# EAGLE board board-mostlaidout-more (EAGLE 9.5.2)
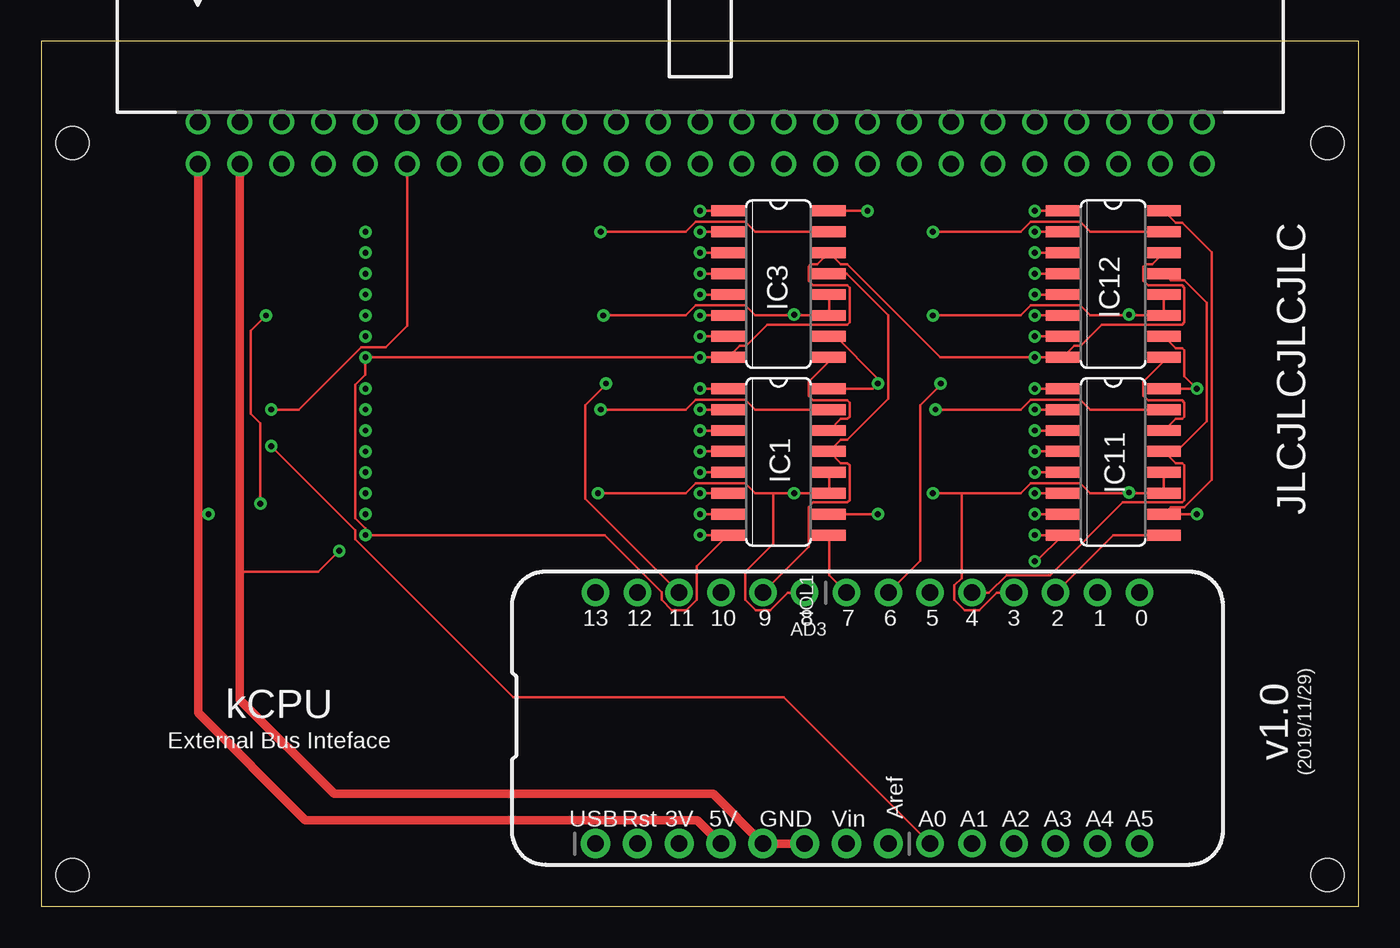
[diagram p0: board, top side]
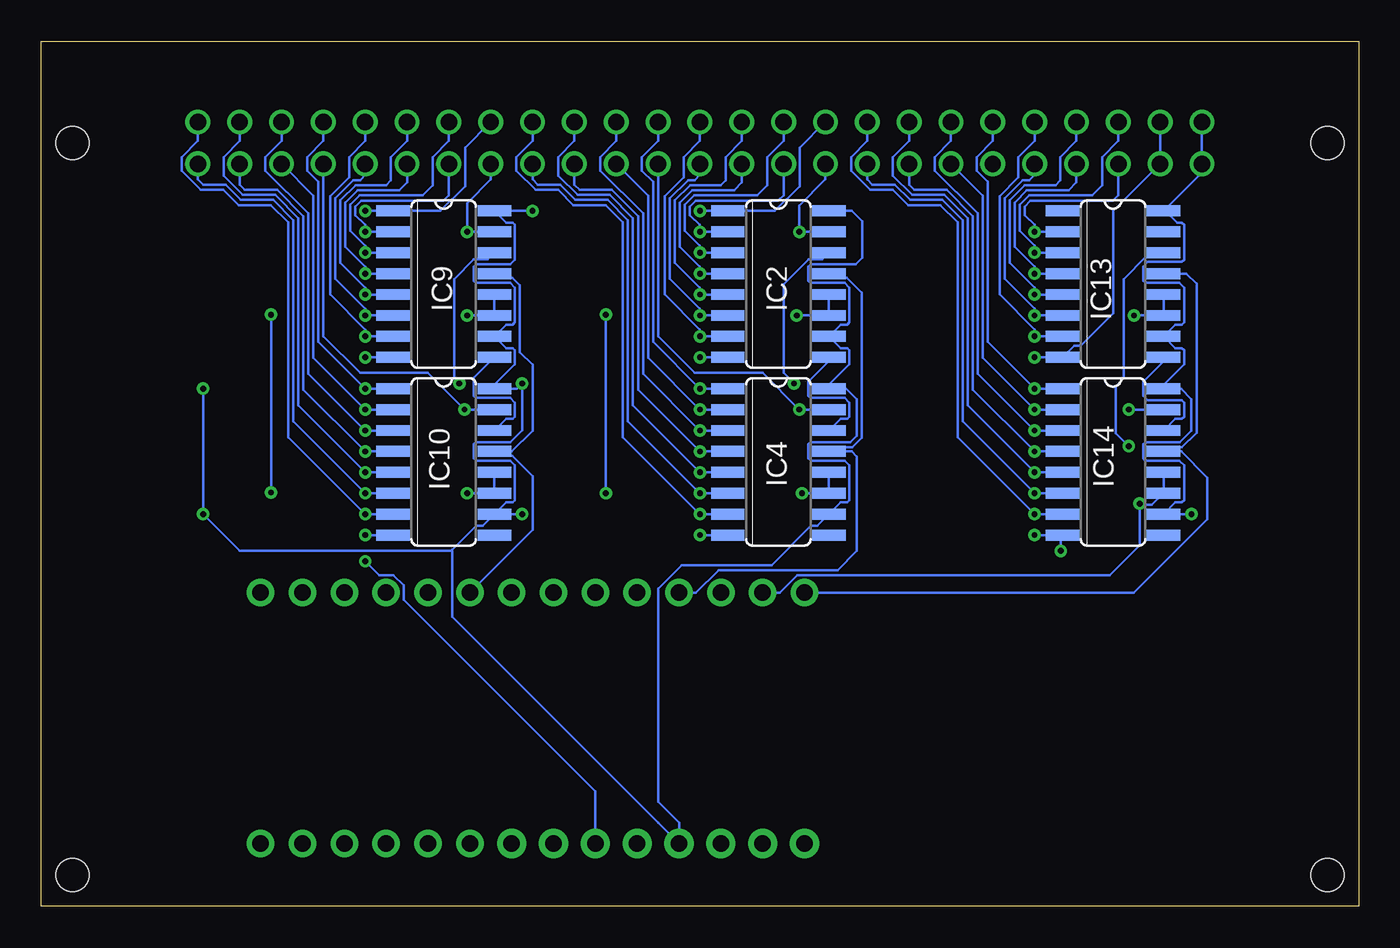
[diagram p1: board, bottom side, seen from below]

Size 80 x 52.53 mm. Coordinates in mm from the lower left corner, seen from the top.
Outline: 0,0 80,0 80,52.53 0,52.53 0,0
Copper layers (1*16): Top 0.035mm / dielectric 1.5mm / Bottom 0.035mm
Design rules "default": minimum track width 6mil, minimum drill 0.35mm, track to track 6mil, track to pad 6mil, pad to pad 6mil, via to via 6mil, smd to smd 6mil, copper to edge 40mil, drill to drill 6mil, minimum pad ring 10mil, minimum via ring 8mil, stop-mask expansion 4mil, vias tented up to drill 0mil, thermal gap 10mil
Net classes: 1 power: width 0.305 mm, drill 0.483 mm, clearance 0.203 mm; 2 gnd: width 0.305 mm, drill 0.483 mm, clearance 0.203 mm; 3 usbvcc: width 0.305 mm, drill 0.483 mm, clearance 0.203 mm
Holes 2 mm at 1.91,46.35 78.11,46.35 1.91,1.91 78.11,1.91

## Footprints (pad centres in the part's own frame; a part is rotated, then mirrored left to right if it is on the bottom)
1X06_ROUND = drill 1 pad 1.676: 1 -6.35,0; 2 -3.81,0; 3 -1.27,0; 4 1.27,0; 5 3.81,0; 6 6.35,0
SO16 = smd 0.66 x 2.032: 1 -4.445,-3.073; 2 -3.175,-3.073; 3 -1.905,-3.073; 4 -0.635,-3.073; 5 0.635,-3.073; 6 1.905,-3.073; 7 3.175,-3.073; 8 4.445,-3.073; 9 4.445,3.073; 10 3.175,3.073; 11 1.905,3.073; 12 0.635,3.073; 13 -0.635,3.073; 14 -1.905,3.073; 15 -3.175,3.073; 16 -4.445,3.073
1X08_ROUND = drill 1 pad 1.676: 1 -8.89,0; 2 -6.35,0; 3 -3.81,0; 4 -1.27,0; 5 1.27,0; 6 3.81,0; 7 6.35,0; 8 8.89,0
1X08_ROUND_70 = drill 1 pad 1.778: 1 -8.89,0; 2 -6.35,0; 3 -3.81,0; 4 -1.27,0; 5 1.27,0; 6 3.81,0; 7 6.35,0; 8 8.89,0
PAK100/2500-5-50 = drill 1 pad 1.422: 1 -30.48,-1.27; 2 -30.48,1.27; 3 -27.94,-1.27; 4 -27.94,1.27; 5 -25.4,-1.27; 6 -25.4,1.27; 7 -22.86,-1.27; 8 -22.86,1.27; 9 -20.32,-1.27; 10 -20.32,1.27; 11 -17.78,-1.27; 12 -17.78,1.27; 13 -15.24,-1.27; 14 -15.24,1.27; 15 -12.7,-1.27; 16 -12.7,1.27; 17 -10.16,-1.27; 18 -10.16,1.27; 19 -7.62,-1.27; 20 -7.62,1.27; 21 -5.08,-1.27; 22 -5.08,1.27; 23 -2.54,-1.27; 24 -2.54,1.27; 25 0,-1.27; 26 0,1.27; 27 2.54,-1.27; 28 2.54,1.27; 29 5.08,-1.27; 30 5.08,1.27; 31 7.62,-1.27; 32 7.62,1.27; 33 10.16,-1.27; 34 10.16,1.27; 35 12.7,-1.27; 36 12.7,1.27; 37 15.24,-1.27; 38 15.24,1.27; 39 17.78,-1.27; 40 17.78,1.27; 41 20.32,-1.27; 42 20.32,1.27; 43 22.86,-1.27; 44 22.86,1.27; 45 25.4,-1.27; 46 25.4,1.27; 47 27.94,-1.27; 48 27.94,1.27; 49 30.48,-1.27; 50 30.48,1.27

## Placement (x,y rotation side)
AD2  20609  [1X06_ROUND]  60.33,3.81 0 top
AD3  20609  [1X06_ROUND]  40.01,19.05 180 top
IC1  74HC597D  [SO16]  44.77,26.99 270 top
IC2  74HC595D  [SO16]  35.24,37.78 270 bottom
IC3  74HC597D  [SO16]  44.77,37.78 270 top
IC4  74HC595D  [SO16]  35.24,26.99 270 bottom
IC9  74HC595D  [SO16]  55.56,37.78 270 bottom
IC10  74HC595D  [SO16]  55.56,26.99 270 bottom
IC11  74HC597D  [SO16]  65.09,26.99 270 top
IC12  74HC597D  [SO16]  65.09,37.78 270 top
IC13  74HC595D  [SO16]  14.92,37.78 270 bottom
IC14  74HC595D  [SO16]  14.92,26.99 270 bottom
IOL1  20610  [1X08_ROUND]  57.78,19.05 0 top
POWER2  20610  [1X08_ROUND_70]  42.55,3.81 0 top
X1  2550-5  [PAK100/2500-5-50]  40.01,46.35 0 top

## Library data of the parts
AD2 AD3 IOL1 POWER2 = microbuilder
IC1-IC4 IC9-IC14 = 74xx-eu
X1 = con-3m; OC_FARNELL: 1788696; OC_NEWARK: unknown

## Nets
BUSA_BIT0: IC2.15 IC3.15 X1.19
BUSA_BIT1: IC2.1 IC3.1 X1.20
BUSA_BIT2: IC2.2 IC3.2 X1.21
BUSA_BIT3: IC2.3 IC3.3 X1.22
BUSA_BIT4: IC2.4 IC3.4 X1.23
BUSA_BIT5: IC2.5 IC3.5 X1.24
BUSA_BIT6: IC2.6 IC3.6 X1.25
BUSA_BIT7: IC2.7 IC3.7 X1.26
BUSA_BIT8: IC1.15 IC4.15 X1.27
BUSA_BIT9: IC1.1 IC4.1 X1.28
BUSA_BIT10: IC1.2 IC4.2 X1.29
BUSA_BIT11: IC1.3 IC4.3 X1.30
BUSA_BIT12: IC1.4 IC4.4 X1.31
BUSA_BIT13: IC1.5 IC4.5 X1.32
BUSA_BIT14: IC1.6 IC4.6 X1.33
BUSA_BIT15: IC1.7 IC4.7 X1.34
BUSA_CLK: AD3.1 IC1.11 IC1.12 IC2.11 IC2.12 IC3.11 IC3.12 IC4.11 IC4.12
BUSA_N_LATCH: AD3.2 IC1.13 IC3.13
BUSA_N_OE: AD3.3 IC2.13 IC4.13
BUSA_SIN: AD3.4 IC2.14
BUSA_SOUT: IC1.9 IOL1.1
BUSB_BIT0: IC9.15 IC12.15 X1.35
BUSB_BIT1: IC9.1 IC12.1 X1.36
BUSB_BIT2: IC9.2 IC12.2 X1.37
BUSB_BIT3: IC9.3 IC12.3 X1.38
BUSB_BIT4: IC9.4 IC12.4 X1.39
BUSB_BIT5: IC9.5 IC12.5 X1.40
BUSB_BIT6: IC9.6 IC12.6 X1.41
BUSB_BIT7: IC9.7 IC12.7 X1.42
BUSB_BIT8: IC10.15 IC11.15 X1.43
BUSB_BIT9: IC10.1 IC11.1 X1.44
BUSB_BIT10: IC10.2 IC11.2 X1.45
BUSB_BIT11: IC10.3 IC11.3 X1.46
BUSB_BIT12: IC10.4 IC11.4 X1.47
BUSB_BIT13: IC10.5 IC11.5 X1.48
BUSB_BIT14: IC10.6 IC11.6 X1.49
BUSB_BIT15: IC10.7 IC11.7 X1.50
BUSB_CLK: IC9.11 IC9.12 IC10.11 IC10.12 IC11.11 IC11.12 IC12.11 IC12.12 IOL1.5
BUSB_N_LATCH: IC11.13 IC12.13 IOL1.4
BUSB_N_OE: IC9.13 IC10.13 IOL1.3
BUSB_SIN: IC9.14 IOL1.2
BUSB_SOUT: IC11.9 IOL1.6
BUSC_BIT2: IC13.2 X1.5
BUSC_BIT3: IC13.3 X1.6
BUSC_BIT4: IC13.4 X1.7
BUSC_BIT5: IC13.5 X1.8
BUSC_BIT6: IC13.6 X1.9
BUSC_BIT7: IC13.7 X1.10
BUSC_BIT8: IC14.15 X1.11
BUSC_BIT9: IC14.1 X1.12
BUSC_BIT10: IC14.2 X1.13
BUSC_BIT11: IC14.3 X1.14
BUSC_BIT12: IC14.4 X1.15
BUSC_BIT13: IC14.5 X1.16
BUSC_BIT14: IC14.6 X1.17
BUSC_BIT15: IC14.7 X1.18
BUSC_CLK: AD3.5 IC13.11 IC13.12 IC14.11 IC14.12
BUSC_N_OE: AD3.6 IC13.13 IC14.13
BUSC_SIN: AD2.1 IC13.14
GND: IC1.8 IC2.8 IC3.8 IC3.14 IC4.8 IC9.8 IC10.8 IC11.8 IC12.8 IC12.14 IC13.8 IC14.8 POWER2.5 POWER2.6 X1.3 X1.4
N$1: IC2.9 IC4.14
N$2: IC1.14 IC3.9
N$5: IC9.9 IC10.14
N$6: IC11.14 IC12.9
N$7: IC13.9 IC14.14
VCC: IC1.10 IC1.16 IC2.10 IC2.16 IC3.10 IC3.16 IC4.10 IC4.16 IC9.10 IC9.16 IC10.10 IC10.16 IC11.10 IC11.16 IC12.10 IC12.16 IC13.10 IC13.16 IC14.10 IC14.16 POWER2.4 X1.1 X1.2

## Tracks (layer width: path | path; a pad name or v marks a point on that pad's centre or on a via)
BUSA_BIT0  (via drill 0.35)
  Top 0.152: IC3.15 43.36,40.96 42.76,41.56 39.75,41.56 39.15,40.96 v33.97,40.96
  Bottom 0.152: IC2.15 v33.97,40.96 33.97,42.55 32.38,44.13 X1.19
BUSA_BIT1  (via drill 0.35)
  Top 0.152: v40.01,42.23 IC3.1
  Bottom 0.152: v40.01,42.23 IC2.1 35.45,42.23 33.94,43.73 33.94,46.07 X1.20
BUSA_BIT2  (via drill 0.35)
  Top 0.152: v40.01,40.96 IC3.2
  Bottom 0.152: IC2.2 v40.01,40.96 40.01,41.37 40.61,41.98 40.61,42.48 40.26,42.83 35.27,42.83 34.92,43.18 X1.21
BUSA_BIT3  (via drill 0.35)
  Top 0.152: v40.01,39.69 IC3.3
  Bottom 0.152: IC2.3 v40.01,39.69 40.01,40.1 40.92,41.01 40.92,42.6 40.34,43.18 36.51,43.18 35.91,43.78 35.91,45.49 34.92,46.48 X1.22
BUSA_BIT4  (via drill 0.35)
  Top 0.152: v40.01,38.42 IC3.4
  Bottom 0.152: IC2.4 v40.01,38.42 40.01,38.83 41.22,40.05 41.22,42.73 40.47,43.48 37.94,43.48 37.47,43.95 X1.23
BUSA_BIT5  (via drill 0.35)
  Top 0.152: v40.01,37.15 IC3.5
  Bottom 0.152: IC2.5 v40.01,37.15 40.01,37.56 41.53,39.08 41.53,42.86 40.59,43.79 38.73,43.79 38.45,44.08 38.45,45.49 37.47,46.48 X1.24
BUSA_BIT6  (via drill 0.35)
  Top 0.152: v40.01,35.88 IC3.6
  Bottom 0.152: IC2.6 v40.01,35.88 40.01,36.29 41.83,38.12 41.83,42.98 40.72,44.09 40.32,44.09 40.01,44.41 X1.25
BUSA_BIT7  (via drill 0.35)
  Top 0.152: v40.01,34.61 IC3.7
  Bottom 0.152: IC2.7 v40.01,34.61 40.01,35.02 42.14,37.15 42.14,43.11 40.99,44.26 40.99,45.49 40.01,46.48 X1.26
BUSA_BIT8  (via drill 0.35)
  Top 0.152: v33.97,30.16 39.15,30.16 39.75,30.77 42.76,30.77 43.36,30.16 IC1.15
  Bottom 0.152: IC4.15 v33.97,30.16 36.2,32.38 40.32,32.38 42.55,34.61 X1.27
BUSA_BIT9  (via drill 0.35)
  Top 0.152: v40.01,31.43 IC1.1
  Bottom 0.152: IC4.1 v40.01,31.43 42.85,34.28 42.85,44 43.53,44.68 43.53,45.49 42.55,46.48 X1.28
BUSA_BIT10  (via drill 0.35)
  Top 0.152: v40.01,30.16 IC1.2
  Bottom 0.152: IC4.2 v40.01,30.16 43.16,33.31 43.16,33.72 43.16,40.64 43.16,43.16 X1.29
BUSA_BIT11  (via drill 0.35)
  Top 0.152: v40.01,28.89 IC1.3
  Bottom 0.152: IC4.3 v40.01,28.89 43.46,32.35 43.46,42.07 46.07,44.68 46.07,45.49 45.09,46.48 X1.30
BUSA_BIT12  (via drill 0.35)
  Top 0.152: v40.01,27.62 IC1.4
  Bottom 0.152: IC4.4 v40.01,27.62 43.76,31.38 43.76,41.91 45.35,43.5 47.31,43.5 47.62,43.81 X1.31
BUSA_BIT13  (via drill 0.35)
  Top 0.152: v40.01,26.35 IC1.5
  Bottom 0.152: IC4.5 v40.01,26.35 44.07,30.42 44.07,41.78 45.48,43.19 47.43,43.19 48.61,44.37 48.61,45.49 47.62,46.48 X1.32
BUSA_BIT14  (via drill 0.35)
  Top 0.152: v40.01,25.08 IC1.6
  Bottom 0.152: IC4.6 v40.01,25.08 44.37,29.45 44.37,41.66 45.6,42.89 47.56,42.89 48.49,43.81 49.85,43.81 50.16,44.13 X1.33
BUSA_BIT15  (via drill 0.35)
  Top 0.152: v40.01,23.81 IC1.7
  Bottom 0.152: IC4.7 v40.01,23.81 44.68,28.49 44.68,41.53 45.73,42.58 47.69,42.58 48.61,43.51 49.98,43.51 51.15,44.68 51.15,45.49 50.16,46.48 X1.34
BUSA_CLK  (via drill 0.35)
  Top 0.152: v34.13,35.88 39.15,35.88 39.75,36.48 42.76,36.48 43.36,35.88 45.72,35.88 | 45.72,35.88 IC3.11 IC3.12 | IC1.12 IC1.11 v45.72,25.08 44.45,25.08 | v33.81,25.08 39.15,25.08 39.75,25.69 42.76,25.69 43.36,25.08 44.45,25.08 | AD3.1 45.32,19.05 44.26,17.98 43.37,17.98 42.75,18.61 42.75,20.32 44.45,22.02 44.45,25.08 | 45.72,35.88 v45.72,35.92
  Bottom 0.152: v34.13,35.88 IC2.11 IC2.12 | IC4.12 IC4.11 v33.81,25.08 | v45.72,35.92 v45.72,25.08
BUSA_N_LATCH
  Top 0.152: IC3.13 48.9,38.42 51.44,35.88 51.44,30.82 48.95,28.33 48.55,28.33 IC1.13 48.55,26.91 48.95,26.91 49.09,26.78 49.09,24.66 48.95,24.52 46.88,24.52 46.6,24.24 46.6,21.83 AD3.2
BUSA_N_OE
  Bottom 0.152: AD3.3 40.24,19.05 38.87,20.42 31.65,20.42 30.48,21.59 30.48,27.3 30.8,27.62 IC4.13 31.91,27.88 30.75,27.88 30.18,28.45 30.18,37.25 31.09,38.16 31.91,38.16 IC2.13
BUSA_SIN  (via drill 0.35)
  Top 0.152: v34.29,31.75 34.29,31.66 33.05,30.41 33.05,24.74 AD3.4
  Bottom 0.152: IC2.14 32.58,39.28 33.41,39.28 34.92,37.76 34.92,32.38 v34.29,31.75
BUSA_SOUT
  Top 0.152: IOL1.1 47.84,20.1 IC1.9
BUSB_BIT0  (via drill 0.35)
  Top 0.152: v54.13,40.96 59.47,40.96 60.07,41.56 63.08,41.56 63.68,40.96 IC12.15
  Bottom 0.152: IC9.15 v54.13,40.96 54.13,42.7 52.7,44.13 X1.35
BUSB_BIT1  (via drill 0.35)
  Top 0.152: v60.33,42.23 IC12.1
  Bottom 0.152: v60.33,42.23 IC9.1 55.77,42.23 54.26,43.73 54.26,46.07 X1.36
BUSB_BIT2  (via drill 0.35)
  Top 0.152: v60.33,40.96 IC12.2
  Bottom 0.152: IC9.2 v60.33,40.96 60.33,41.37 60.93,41.98 60.93,42.48 60.58,42.83 55.59,42.83 55.24,43.18 X1.37
BUSB_BIT3  (via drill 0.35)
  Top 0.152: v60.33,39.69 IC12.3
  Bottom 0.152: IC9.3 v60.33,39.69 60.33,40.1 61.24,41.01 61.24,42.6 60.66,43.18 56.83,43.18 56.23,43.78 56.23,45.49 55.24,46.48 X1.38
BUSB_BIT4  (via drill 0.35)
  Top 0.152: v60.33,38.42 IC12.4
  Bottom 0.152: IC9.4 v60.33,38.42 60.33,38.83 61.54,40.05 61.54,42.73 60.79,43.48 58.26,43.48 57.78,43.95 X1.39
BUSB_BIT5  (via drill 0.35)
  Top 0.152: v60.33,37.15 IC12.5
  Bottom 0.152: IC9.5 v60.33,37.15 60.33,37.56 61.85,39.08 61.85,42.86 60.91,43.79 59.05,43.79 58.77,44.08 58.77,45.49 57.78,46.48 X1.40
BUSB_BIT6  (via drill 0.35)
  Top 0.152: v60.33,35.88 IC12.6
  Bottom 0.152: IC9.6 v60.33,35.88 60.33,36.29 62.15,38.12 62.15,42.98 61.04,44.09 60.64,44.09 60.33,44.41 X1.41
BUSB_BIT7  (via drill 0.35)
  Top 0.152: v60.33,34.61 IC12.7
  Bottom 0.152: IC9.7 v60.33,34.61 60.33,35.02 62.46,37.15 62.46,43.11 61.31,44.26 61.31,45.49 60.33,46.48 X1.42
BUSB_BIT8  (via drill 0.35)
  Top 0.152: IC11.15 63.68,30.16 63.08,30.77 60.07,30.77 59.47,30.16 v54.29,30.16
  Bottom 0.152: X1.43 62.87,34.61 60.64,32.38 56.52,32.38 v54.29,30.16 IC10.15
BUSB_BIT9  (via drill 0.35)
  Top 0.152: v60.33,31.43 IC11.1
  Bottom 0.152: IC10.1 v60.33,31.43 63.17,34.28 63.17,44 63.85,44.68 63.85,45.49 62.87,46.48 X1.44
BUSB_BIT10  (via drill 0.35)
  Top 0.152: v60.33,30.16 IC11.2
  Bottom 0.152: IC10.2 v60.33,30.16 63.48,33.31 63.48,33.72 63.48,40.64 63.48,43.16 X1.45
BUSB_BIT11  (via drill 0.35)
  Top 0.152: v60.33,28.89 IC11.3
  Bottom 0.152: IC10.3 v60.33,28.89 63.78,32.35 63.78,42.07 66.39,44.68 66.39,45.49 65.41,46.48 X1.46
BUSB_BIT12  (via drill 0.35)
  Top 0.152: v60.33,27.62 IC11.4
  Bottom 0.152: IC10.4 v60.33,27.62 64.08,31.38 64.08,41.91 65.67,43.5 67.63,43.5 67.94,43.81 X1.47
BUSB_BIT13  (via drill 0.35)
  Top 0.152: v60.33,26.35 IC11.5
  Bottom 0.152: IC10.5 v60.33,26.35 64.39,30.42 64.39,41.78 65.8,43.19 67.75,43.19 68.93,44.37 68.93,45.49 67.94,46.48 X1.48
BUSB_BIT14  (via drill 0.35)
  Top 0.152: v60.33,25.08 IC11.6
  Bottom 0.152: IC10.6 v60.33,25.08 64.69,29.45 64.69,41.66 65.92,42.89 67.88,42.89 68.81,43.81 70.17,43.81 70.48,44.13 X1.49
BUSB_BIT15  (via drill 0.35)
  Top 0.152: v60.33,23.81 IC11.7
  Bottom 0.152: IC10.7 v60.33,23.81 65,28.49 65,41.53 66.05,42.58 68.01,42.58 68.93,43.51 70.3,43.51 71.47,44.68 71.47,45.49 70.48,46.48 X1.50
BUSB_CLK  (via drill 0.35)
  Top 0.152: v54.13,35.88 59.47,35.88 60.07,36.48 63.08,36.48 63.68,35.88 66.04,35.88 | 66.04,35.88 IC12.11 IC12.12 | IC11.12 IC11.11 66.04,25.08 | v54.13,25.08 55.88,25.08 | 55.88,25.08 59.47,25.08 60.07,25.69 63.08,25.69 63.68,25.08 66.04,25.08 | IOL1.5 58.02,19.05 56.96,17.98 56.07,17.98 55.45,18.61 55.45,19.49 55.88,19.92 55.88,25.08 | 66.04,35.88 v66.04,35.92 | 66.04,25.08 v66.04,25.13
  Bottom 0.152: v54.13,35.88 IC9.11 IC9.12 | IC10.12 IC10.11 v54.13,25.08 | v66.04,25.13 v66.04,35.92
BUSB_N_LATCH
  Top 0.152: IC11.13 68.21,27.57 | 68.21,27.57 68.87,26.91 69.27,26.91 69.41,26.78 69.41,24.66 69.27,24.52 65.67,24.52 61.26,20.12 58.61,20.12 57.55,19.05 IOL1.4 | IC12.13 68.57,38.01 69.4,38.01 70.77,36.63 70.77,29.45 68.9,27.57 68.21,27.57
BUSB_N_OE
  Bottom 0.152: IC9.13 52.23,38.16 51.41,38.16 50.94,37.7 50.94,33.66 50.16,32.88 50.16,28.89 51.44,27.62 IC10.13 52.23,27.37 51.41,27.37 50.16,26.13 50.16,22.86 IOL1.3
BUSB_SIN  (via drill 0.35)
  Top 0.152: v54.61,31.75 54.61,31.66 53.37,30.41 53.37,20.98 IOL1.2
  Bottom 0.152: IC9.14 52.9,39.28 53.73,39.28 54.93,38.08 54.93,32.07 v54.61,31.75
BUSB_SOUT
  Top 0.152: IOL1.6 65.09,22.54 IC11.9
BUSC_BIT2  (via drill 0.35)
  Bottom 0.152: IC13.2 v19.68,40.96 19.68,41.37 20.29,41.98 20.29,42.48 19.94,42.83 14.95,42.83 14.61,43.18 X1.5
BUSC_BIT3  (via drill 0.35)
  Bottom 0.152: IC13.3 v19.68,39.69 19.68,40.1 20.6,41.01 20.6,42.6 20.02,43.18 16.19,43.18 15.59,43.78 15.59,45.49 14.61,46.48 X1.6
BUSC_BIT4  (via drill 0.35)
  Bottom 0.152: IC13.4 v19.68,38.42 19.68,38.83 20.9,40.05 20.9,42.73 20.15,43.48 17.61,43.48 17.14,43.95 X1.7
BUSC_BIT5  (via drill 0.35)
  Bottom 0.152: IC13.5 v19.68,37.15 19.68,37.56 21.21,39.08 21.21,42.86 20.27,43.79 18.41,43.79 18.13,44.08 18.13,45.49 17.14,46.48 X1.8
BUSC_BIT6  (via drill 0.35)
  Bottom 0.152: IC13.6 v19.68,35.88 19.68,36.29 21.51,38.12 21.51,42.98 20.4,44.09 20,44.09 19.68,44.41 X1.9
BUSC_BIT7  (via drill 0.35)
  Bottom 0.152: IC13.7 v19.68,34.61 19.68,35.02 21.82,37.15 21.82,43.11 20.67,44.26 20.67,45.49 19.68,46.48 X1.10
BUSC_BIT8  (via drill 0.35)
  Top 0.152: X1.11 22.23,35.24 20.93,33.94 19.43,33.94 15.65,30.16 v13.97,30.16
  Bottom 0.152: v13.97,30.16 IC14.15
BUSC_BIT9  (via drill 0.35)
  Bottom 0.152: IC14.1 v19.68,31.43 22.53,34.28 22.53,44 23.21,44.68 23.21,45.49 22.23,46.48 X1.12
BUSC_BIT10  (via drill 0.35)
  Bottom 0.152: IC14.2 v19.68,30.16 22.84,33.31 22.84,33.72 22.84,40.64 22.84,43.16 X1.13
BUSC_BIT11  (via drill 0.35)
  Bottom 0.152: IC14.3 v19.68,28.89 23.14,32.35 23.14,42.07 25.75,44.68 25.75,45.49 24.77,46.48 X1.14
BUSC_BIT12  (via drill 0.35)
  Bottom 0.152: IC14.4 v19.68,27.62 23.44,31.38 23.44,41.91 25.03,43.5 26.99,43.5 27.3,43.81 X1.15
BUSC_BIT13  (via drill 0.35)
  Bottom 0.152: IC14.5 v19.68,26.35 23.75,30.42 23.75,41.78 25.16,43.19 27.11,43.19 28.29,44.37 28.29,45.49 27.3,46.48 X1.16
BUSC_BIT14  (via drill 0.35)
  Bottom 0.152: IC14.6 v19.68,25.08 24.05,29.45 24.05,41.66 25.28,42.89 27.24,42.89 28.17,43.81 29.53,43.81 29.84,44.13 X1.17
BUSC_BIT15  (via drill 0.35)
  Bottom 0.152: IC14.7 v19.68,23.81 24.36,28.49 24.36,41.53 25.41,42.58 27.37,42.58 28.29,43.51 29.66,43.51 30.83,44.68 30.83,45.49 29.84,46.48 X1.18
BUSC_CLK  (via drill 0.35)
  Top 0.152: v13.31,24.45 13.31,29.33 12.73,29.91 12.73,34.95 v13.65,35.88
  Bottom 0.152: IC13.12 IC13.11 v13.65,35.88 | IC14.12 IC14.11 12.56,24.37 13.23,24.37 v13.31,24.45 13.31,21.93 15.13,20.12 34.1,20.12 35.16,19.05 AD3.5
BUSC_N_OE
  Bottom 0.152: AD3.6 13.67,19.05 9.21,23.52 9.21,26.04 10.79,27.62 IC14.13 11.6,27.88 10.74,27.88 9.86,28.77 9.86,37.8 10.48,38.42 IC13.13
BUSC_SIN  (via drill 0.35)
  Top 0.152: v13.97,27.94 19.08,22.83 19.08,22.29 28.67,12.7 45.09,12.7 AD2.1
  Bottom 0.152: IC13.14 12.1,39.43 12.93,39.43 14.29,38.08 14.29,32.07 14.76,31.59 14.76,28.73 v13.97,27.94
GND  (via drill 0.35)
  Top 0.152: v40.01,22.54 IC1.8 39.8,20.65 39.8,18.61 39.18,17.98 38.29,17.98 37.67,18.61 37.67,19.09 34.21,22.54 20,22.54 19.68,22.86 | v60.33,22.54 IC11.8 60.43,20.95 v60.33,20.95 | IC12.14 67.45,38.98 67.05,38.98 66.92,38.84 66.92,37.99 67.2,37.71 69.27,37.71 69.41,37.57 69.41,35.45 69.27,35.32 64.39,35.32 63.12,34.05 62.73,34.05 IC12.8 v60.33,33.34 54.59,33.34 48.95,38.98 48.55,38.98 IC3.14 47.13,38.98 46.73,38.98 46.6,38.84 46.6,37.99 46.88,37.71 48.95,37.71 49.09,37.57 49.09,35.45 48.95,35.32 44.08,35.32 42.8,34.05 42.41,34.05 IC3.8 v40.01,33.34 v19.68,33.34 19.68,32.29 19.08,31.68 19.08,23.56 19.68,22.95 19.68,22.86 | v19.68,22.54 19.68,22.86 | v18.1,21.59 16.83,20.32 12.06,20.32
  Top 0.508: X1.3 12.06,20.32 12.06,12.54 17.78,6.83 40.8,6.83 POWER2.5 POWER2.6
  Bottom 0.152: X1.4 X1.3 14.92,42.23 14.92,36.01 16.89,34.05 17.29,34.05 IC13.8 v19.68,33.34 | IC2.8 v40.01,33.34 | IC4.8 v40.01,22.54 | IC9.8 v60.33,33.34 | IC10.8 v60.33,22.54 | IC14.8 18.1,22.54 | 18.1,22.54 v19.68,22.54 | v18.1,21.59 18.1,22.54 | POWER2.6 46.35,6.99 57.99,18.62 57.99,19.49 58.61,20.12 59.49,20.12 v60.33,20.95
N$1
  Bottom 0.152: IC4.14 31.46,29.6 31.06,29.6 30.92,29.74 30.92,30.59 31.21,30.87 33.28,30.87 33.41,31.01 33.41,31.86 32.17,33.1 IC2.9
N$2
  Top 0.152: IC3.9 47.84,33.1 46.6,31.86 46.6,31.01 46.88,30.72 48.95,30.72 49.09,30.59 49.09,29.74 48.95,29.6 48.55,29.6 IC1.14
N$5
  Bottom 0.152: IC10.14 51.78,29.6 51.38,29.6 51.24,29.74 51.24,30.59 51.53,30.87 53.6,30.87 53.73,31.01 53.73,32.09 IC9.9
N$6
  Top 0.152: IC12.9 68.16,33.1 66.92,31.86 66.92,31.01 67.2,30.72 69.27,30.72 69.41,30.59 69.41,29.74 69.27,29.6 68.87,29.6 IC11.14
N$7
  Bottom 0.152: IC13.9 11.85,33.1 13.09,31.86 13.09,31.01 12.81,30.72 10.74,30.72 10.6,30.59 10.6,29.74 10.74,29.6 11.14,29.6 IC14.14
VCC  (via drill 0.35)
  Top 0.152: IC3.16 v50.16,42.23 | IC3.10 48.24,34.61 50.8,32.05 v50.8,31.75 50.48,31.43 IC1.16 | 9.53,24.13 9.84,23.81 v10.16,23.81 | v50.8,23.81 IC1.10 | v70.17,23.81 IC11.10 68.57,24.22 69.4,24.22 71.08,25.9 71.08,39.71 69.27,41.52 68.87,41.52 IC12.16 | IC11.16 v70.17,31.43 69.41,32.19 69.41,33.76 69.27,33.9 68.87,33.9 IC12.10
  Top 0.508: X1.1 9.53,24.13 9.53,11.75 16.03,5.24 39.85,5.24 POWER2.4
  Bottom 0.152: X1.2 X1.1 9.53,44.55 11.8,42.28 | IC13.16 11.8,42.28 | 11.8,42.28 11.04,41.52 10.74,41.52 10.6,41.38 10.6,39.26 10.74,39.13 12.81,39.13 13.09,38.84 13.09,37.99 12.96,37.86 10.89,37.86 10.6,37.57 10.6,35.45 10.74,35.32 11.14,35.32 IC13.10 11.14,33.9 10.74,33.9 10.6,33.76 10.6,32.91 11.85,31.67 IC14.16 10.79,31.43 10.16,30.8 10.16,28.89 10.87,28.18 12.96,28.18 13.09,28.05 13.09,27.2 12.96,27.06 10.89,27.06 10.6,26.78 10.6,24.66 10.74,24.52 11.14,24.52 IC14.10 v10.16,23.81 | 32.17,31.67 31.35,31.67 30.48,30.8 30.48,28.57 30.87,28.18 33.28,28.18 33.41,28.05 33.41,27.2 33.28,27.06 31.21,27.06 30.92,26.78 30.92,24.66 31.06,24.52 31.46,24.52 IC4.10 32.88,23.1 33.28,23.1 35.66,20.73 41.11,20.73 42.55,19.29 42.55,6.35 41.27,5.08 POWER2.4 42.55,5.08 55.04,17.58 55.04,21.59 | IC4.16 32.17,31.67 | 32.17,31.67 30.92,32.91 30.92,33.76 31.06,33.9 31.46,33.9 IC2.10 31.46,35.32 31.06,35.32 30.92,35.45 30.92,37.57 31.21,37.86 33.28,37.86 33.41,37.99 33.41,38.84 33.28,38.98 30.56,38.98 30.16,39.37 30.16,41.59 30.8,42.23 IC2.16 | IC10.10 51.78,24.52 51.38,24.52 51.24,24.66 51.24,26.78 51.53,27.06 53.6,27.06 53.73,27.2 53.73,28.05 53.6,28.18 51.53,28.18 50.8,28.91 v50.8,31.75 51.12,31.43 IC10.16 52.49,31.67 51.24,32.91 51.24,33.76 51.38,33.9 51.78,33.9 IC9.10 51.78,35.32 51.38,35.32 51.24,35.45 51.24,37.57 51.53,37.86 53.6,37.86 53.73,37.99 53.73,38.84 53.6,38.98 51.53,38.98 51.24,39.26 51.24,41.38 51.38,41.52 51.78,41.52 IC9.16 v50.16,42.23 | IC10.10 53.2,23.1 53.6,23.1 55.04,21.66 55.04,21.59 | IC10.10 v50.8,23.81 | 55.04,21.59 67.94,21.59 v70.17,23.81 v70.17,31.43

## Text on the board
tPlace: 13 | 12 | 11 | 10 | 9 | 8 | 7 | 6 | 5 | 4 | 3 | 2 | 1 | 0 | Aref | USB | Rst | 3V | 5V | GND | Vin | A0 | A1 | A2 | A3 | A4 | A5
tNames: JLCJLCJLCJLC | kCPU | v1.0 | (2019/11/29) | External Bus Inteface
214bmp: D:/SmartProjects/Snc/a4_bn_logo2.bmp